# Altium PCB CU.PcbDoc
Units mil, origin at the board's own origin, x right, y up, seen from the top; angles counter-clockwise.
Board outline 3149.61 x 2263.78 mil, 2 copper layers (Top Layer, Bottom Layer); 49 components, 65 nets, 216 pads, 24 vias.
Unrouted connection lines stored in the file: 3.
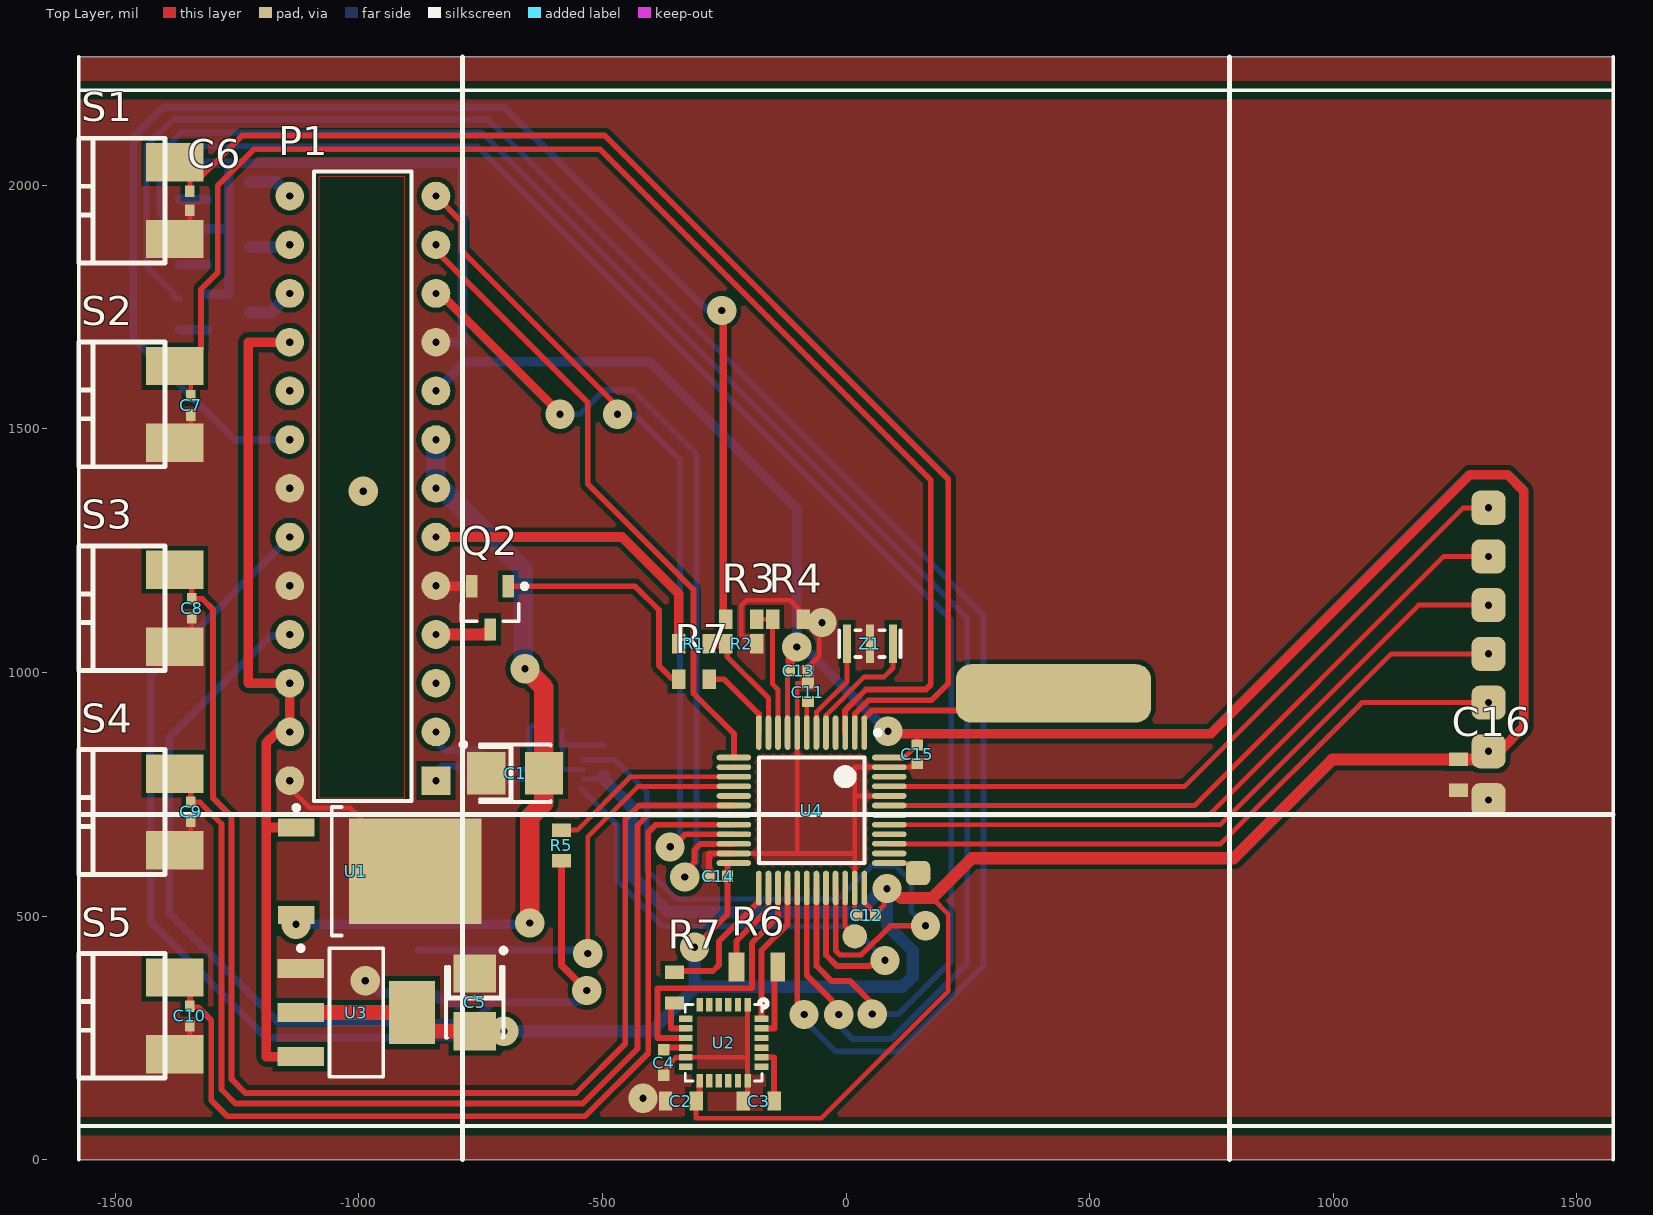
[diagram p0: Top Layer view]
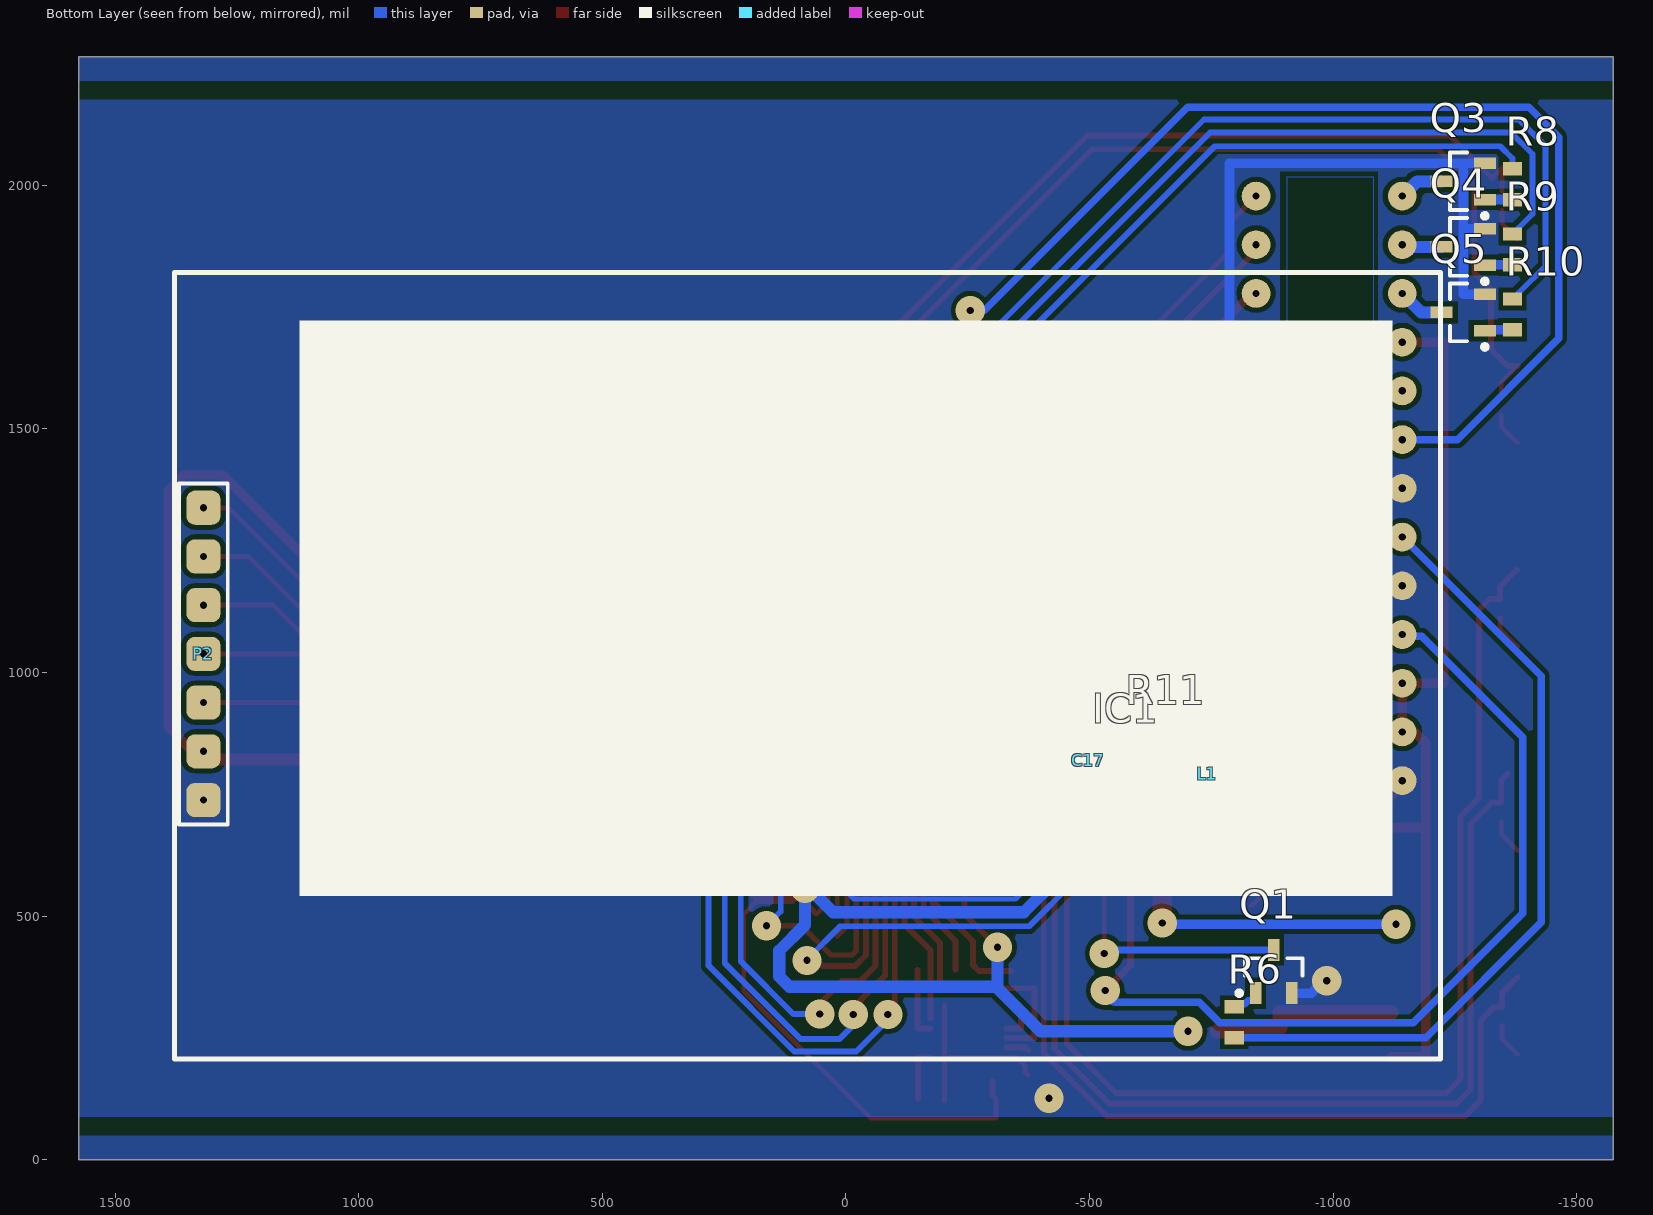
[diagram p1: Bottom Layer view, seen from below]

## Layer stack, top to bottom
Top Solder: solder mask 0.4, Solder Resist, Dk 3.5
Top Layer: signal copper 1.4
Dielectric 1: dielectric 12.6, FR-4, Dk 4.8
Bottom Layer: signal copper 1.4
Bottom Solder: solder mask 0.4, Solder Resist, Dk 3.5

## Board outline
-1574.8,0 -1574.8,2263.78 1574.8,2263.78 1574.8,0

## Design rules (kind name [scope] priority, off if disabled: settings)
Clearance [All] p1: gap=5 ignorepadtopadclearanceinfootprint=FALSE except(0: Arc-Hole Track-Hole SMDPad-Hole THPad-Hole Via-Hole Fill-Hole Poly-Hole Region-Hole Text-Hole; 10: Arc-Poly Track-Poly SMDPad-Poly THPad-Poly Via-Poly Fill-Poly Poly-Poly)
ComponentClearance [All] p1 off: gap=10 collisioncheckmode=3 verticalgap=10 showdistances=FALSE
Height [All] p1 off: minheight=0 maxheight=1000 prefheight=500
MinimumSolderMaskSliver [All] p1 off: minsoldermaskwidth=10
PolygonConnect [All] p1: connectstyle=Direct reliefconductorwidth=10 reliefentries=4 polygonreliefangle="90 Angle" airgapwidth=10
RoutingVias [All] p1: holewidth=28 width=60 viastyle="Through Hole" minholewidth=1 minwidth=1 maxholewidth=280 maxwidth=500
SilkToSilkClearance [All] p1 off: silktosilkclearance=10
SilkToSolderMaskClearance [IsPad] p1 off: minsilkscreentomaskgap=10 clearancetoexposedcopper=TRUE
SolderMaskExpansion [All] p1: expansion=4
Width [All] p1: maxlimit=200 minlimit=8 preferedwidth=10
25 further rules are at their usual default settings.

## Components (designator, comment, footprint, x,y, rotation, side; value= is the part's Value field where it differs from the comment)
C1 "Cap" RR_B -679,793 r0 top value=100nF
C2 "Cap402" 0603x -339,120.32 r0 top value=100nF
C3 "Cap603" 0603x -179,120.32 r0 top value=2.2nF
C4 "Cap402" 0402x#1 -374,199.32 r270 top value=100nF
C5 "Cap" RR_B -762,323 r270 top value=100nF
C6 "Cap" 0402 -1346.81,1968 r270 top value=100nF
C7 "Cap" 0402 -1344.91,1548 r270 top value=100nF
C8 "Cap" 0402 -1343,1132 r270 top value=100nF
C9 "Cap" 0402 -1344.91,714 r270 top value=100nF
C10 "Cap" 0402 -1346.81,295 r270 top value=100nF
C11 "Cap" 0402x#2 -78,959.32 r270 top value=100nF
C12 "Cap" 0402x#2 42,501.32 r0 top value=100nF
C13 "Cap" 0402x#2 -97,1003.32 r180 top value=100nF
C14 "Cap" 0402x#2 -262,582 r0 top value=100nF
C15 "Cap" 0402x#2 146,832.32 r90 top value=100nF
C16 "Cap" 0603x 1257,790 r90 top value=100nF
C17 "Cap" 0603x -497,819.76 r270 bottom value=100nF
IC1 "TCAN332GDCNT" RR_DFN8_3X3 -598.24,790.23 r180 bottom
L1 "CMC 100MA 2LN 90 OHM SMD" Choke_smd -741.87,792.39 r0 bottom
P1 "Header 13X2A" HDR2X13_WIDE -941.73,777.95 r90 top locked
P2 "Header 7" OLED_DISPLAY_2.42 0,1131.89 r180 bottom locked
Q1 "IRLML2502" SOT-23_N -878,386 r90 bottom
Q2 "IRLML2502" SOT-23_N -730.6,1132.71 r270 top
Q3 "IRLML2502" SOT-23_N -1267,2008 r0 bottom
Q4 "IRLML2502" SOT-23_N -1267,1873.5 r0 bottom
Q5 "IRLML2502" SOT-23_N -1267,1739 r0 bottom
R1 "Res1" 0603x -312,1059 r0 top value=1K
R2 "Res1" 0603x -215,1059 r0 top value=1K
R3 "Res1" 0603x -215,1109.32 r0 top value=1K
R4 "Res1" 0603x -119,1109.32 r0 top value=1K
R5 "Res1" 0603x -584,645 r90 top value=1K
R6 "Res1" 0805x -183,395.32 r180 top value=1K
R6 "" 0603x -797,282 r270 bottom value=100
R7 "Res1" 0603x -352,353 r270 top value=1K
R7 "" 0603x -312,986 r0 top value=100
R8 "" 0603x -1368,2002 r90 bottom value=100
R9 "" 0603x -1368,1868.5 r90 bottom value=100
R10 "" 0603x -1368,1735 r90 bottom value=100
R11 "Res1" 0603x -613.92,880.97 r0 bottom value=1K
S1 "SW-PB" BTN_WATEPROOF_RIGHT -1397.64,1968.5 r0 top
S2 "SW-PB" BTN_WATEPROOF_RIGHT -1397.64,1550.2 r0 top
S3 "SW-PB" BTN_WATEPROOF_RIGHT -1397.64,1131.89 r0 top
S4 "SW-PB" BTN_WATEPROOF_RIGHT -1397.64,713.58 r0 top
S5 "SW-PB" BTN_WATEPROOF_RIGHT -1397.64,295.28 r0 top
U1 "LM78M05CDT/NOPB" TD03B_N -957,592 r0 top
U2 "MPU-6000" IMU-3000 -251.17,239.87 r270 top
U3 "LM1117IMP-5.0/NOPB" MP04A_N -1005,302 r0 top
U4 "STM32F303C8T6" LQFP48_N -70.61,717.09 r270 top
Z1 "AWSCR-8.00CV-T" CRYSTAL_3.2X1.3 49.21,1059 r180 top value="CER RES 8.0000MHZ 22PF SMD"

## Footprints (in the part's own frame and the unit in brackets; to place one, negate y for a bottom-side part, rotate by r counter-clockwise, add the part's x,y. Pads: shape width x height; smd on the part's side, far side on the other; paste and mask are expansions set on the pad)
0402 [mm] "Chip Capacitor, Body 1.0x0.5mm, IPC High Density"
  rect 0.6x0.5 smd: 1(-0.5,0) 2(0.5,0)
  body extent -0.55,-0.3 0.55,0.3, height 1.3
0402x#1 [mm] "Chip Capacitor, Body 1.0x0.5mm, IPC Medium Density"
  rect 0.6x0.6 smd: 1(-0.66,0) 2(0.66,0)
  body extent -0.5,-0.25 0.5,0.25, height 0.6
0402x#2 [mm] "Chip Capacitor, Body 1.0x0.5mm, IPC Medium Density"
  rect 0.57x0.6 smd: 1(-0.48,0) 2(0.48,0)
  body extent -0.5,-0.25 0.5,0.25, height 0.6
0603x [mm] "Chip Resistor; Body 1.6 x 0.8 mm (LxW typ)"
  rect 0.7x1 smd: 1(-0.8,0) 2(0.8,0)
0805x [mil] "Chip Resistor; Body 2 x 1.3 mm (LxW typ)"
  rect 33x59.06 smd: 1(42,0)
  rect 30x59.06 smd: 2(-43,0)
BTN_WATEPROOF_RIGHT [mm]
  rect 3x2 smd: 1(0.5,-2) 2(0.5,2)
  silkscreen extent -4.5,-3.25 0,3.25
Choke_smd [mm] "Smd choke"
  rect 0.7x0.45 smd: 1(-0.9,0.4) 2(-0.9,-0.4) 3(0.9,-0.4) 4(0.9,0.4)
  silkscreen extent -1,-0.63 1,0.63
CRYSTAL_3.2X1.3 [mm]
  rect 0.4x2 smd: 1(1.2,0) 2(0,0) 3(-1.2,0)
  silkscreen extent -1.6,-0.7 1.6,0.7, body extent -1.6,-0.7 1.6,0.7, height 0.9
HDR2X13_WIDE [mm] "Connector; Header; 13x2 Position"
  rect 1.5x1.5 hole 0.381: 1(0,-2.54)
  round 1.5 hole 0.381: 2(2.54,-2.54) 3(5.08,-2.54) 4(7.62,-2.54) 5(10.16,-2.54) 6(12.7,-2.54) 7(15.24,-2.54) 8(17.78,-2.54) 9(20.32,-2.54) 10(22.86,-2.54) 11(25.4,-2.54) 12(27.94,-2.54) 13(30.48,-2.54) 14(0,5.08) 15(2.54,5.08) 16(5.08,5.08) 17(7.62,5.08) 18(10.16,5.08) 19(12.7,5.08) 20(15.24,5.08) 21(17.78,5.08) 22(20.32,5.08) 23(22.86,5.08) 24(25.4,5.08) 25(27.94,5.08) 26(30.48,5.08)
  silkscreen extent -1.06,-1.27 31.75,3.81
IMU-3000 [mm]
  rect 0.711x0.337 smd paste-0.03 mask+0.04: 1(-1.975,1.25) 2(-1.975,0.75) 3(-1.975,0.25) 4(-1.975,-0.25) 5(-1.975,-0.75) 6(-1.975,-1.25) 13(1.975,-1.25) 14(1.975,-0.75) 15(1.975,-0.25) 16(1.975,0.25) 17(1.975,0.75) 18(1.975,1.25)
  rect 0.337x0.711 smd paste-0.03 mask+0.04: 7(-1.25,-1.975) 8(-0.75,-1.975) 9(-0.25,-1.975) 10(0.25,-1.975) 11(0.75,-1.975) 12(1.25,-1.975) 19(1.25,1.975) 20(0.75,1.975) 21(0.25,1.975) 22(-0.25,1.975) 23(-0.75,1.975) 24(-1.25,1.975)
  silkscreen extent -2.25,-2 2,2.27, body extent -2,-2 2,2, height 0.95
LQFP48_N [mm] "Thin QFP, 48-Leads, Body 7x7mm, Pitch 0.5mm, IPC Medium Density"
  oval 1.8x0.3 smd: 1(-4.05,2.75) 2(-4.05,2.25) 3(-4.05,1.75) 4(-4.05,1.25) 5(-4.05,0.75) 6(-4.05,0.25) 7(-4.05,-0.25) 8(-4.05,-0.75) 9(-4.05,-1.25) 10(-4.05,-1.75) 11(-4.05,-2.25) 12(-4.05,-2.75) 25(4.05,-2.75) 26(4.05,-2.25) 27(4.05,-1.75) 28(4.05,-1.25) 29(4.05,-0.75) 30(4.05,-0.25) 31(4.05,0.25) 32(4.05,0.75) 33(4.05,1.25) 34(4.05,1.75) 35(4.05,2.25) 36(4.05,2.75)
  oval 0.3x1.8 smd: 13(-2.75,-4.05) 14(-2.25,-4.05) 15(-1.75,-4.05) 16(-1.25,-4.05) 17(-0.75,-4.05) 18(-0.25,-4.05) 19(0.25,-4.05) 20(0.75,-4.05) 21(1.25,-4.05) 22(1.75,-4.05) 23(2.25,-4.05) 24(2.75,-4.05) 37(2.75,4.05) 38(2.25,4.05) 39(1.75,4.05) 40(1.25,4.05) 41(0.75,4.05) 42(0.25,4.05) 43(-0.25,4.05) 44(-0.75,4.05) 45(-1.25,4.05) 46(-1.75,4.05) 47(-2.25,4.05) 48(-2.75,4.05)
  silkscreen extent -4.17,-2.75 2.75,3.58, body extent -3.5,-3.5 3.5,3.5, height 1.6
MP04A_N [mm] "SOT223, 4-Leads, Body 6.5x3.5mm, Pitch 2.3mm, Lead Span 7mm, IPC Medium Density"
  rect 2.4x1 smd: 1(-2.9,2.3) 2(-2.9,0) 3(-2.9,-2.3)
  rect 2.4x3.3 smd: 4(2.9,0)
  silkscreen extent -3.02,-3.35 1.4,3.47, body extent -1.85,-3.35 1.85,3.35, height 1.8
OLED_DISPLAY_2.42 [mil] "Connector; Header; 7 Position"
  rrect50% 70x70 hole 15: 1(-1318.9,-393.7) 2(-1318.9,-293.7) 3(-1318.9,-193.7) 4(-1318.9,-93.7) 5(-1318.9,6.3) 6(-1318.9,106.3) 7(-1318.9,206.3)
  silkscreen extent -1378,-925 1220,689
RR_B [mm] "Capacitor, SM Tantalum; Body 3.5 x 2.8 mm (LxW typ)"
  rect 2x2.2 smd: 1(-1.5,0) 2(1.5,0)
  silkscreen extent -2.82,-1.5 1.85,1.62, body extent -1.5,-1.5 1.5,1.5, height 2.1
RR_DFN8_3X3 [mm] "SON, 8-Leads, Body 3x3mm, Pitch 0.65mm, Microchip Recommended"
  rect 0.65x0.35 smd: 1(-1.4,0.75) 2(-1.4,0.25) 3(-1.4,-0.25) 4(-1.4,-0.75) 5(1.4,-0.75) 6(1.4,-0.25) 7(1.4,0.25) 8(1.4,0.75)
  rect 1.65x2.38 smd: 9(0,0)
  silkscreen extent -2.47,-1.7 1.7,1.82, body extent -1.55,-1.55 1.55,1.55, height 1
SOT-23_N [mm] "SOT23, 3-Leads, Body 2.9x1.3mm, Pitch 0.95mm, Lead Span 2.3mm, IPC Medium Density"
  rect 1.15x0.6 smd: 1(-1.125,0.95) 2(-1.125,-0.95) 3(1.125,0)
  silkscreen extent -1.25,-1.5 0.7,1.93, body extent -0.7,-1.5 0.7,1.5, height 1.11
TD03B_N [mm] "D-PAK, 4-Leads, Body 6.1x6.6mm, Pitch 2.29mm, Lead Span 9.7mm, IPC Medium Density"
  rect 1.9x0.95 smd: 1(-4.35,2.28) 3(-4.35,-2.28)
  rect 6.9x5.5 smd: 4(1.85,0)
  silkscreen extent -4.47,-3.35 -2,3.43, body extent -2.5,-3.35 3.7,3.35, height 2.38

## Part data
C1 C5 C6 C7 C8 C9 C10 C11 C12 C13 C14 C15 C16 C17: "Capacitor", LatestRevisionDate=17-Jul-2002, LatestRevisionNote="Re-released for DXP Platform.", PackageDescription="Radial Cap, Thru-Hole; 2 Leads; 0.3 in Pin Spacing", PackageReference=RAD-0.3, Published=8-Jun-2000, Publisher="Altium Limited"
C2 C4: "Capacitor SMD", Supplier Part Number 1=445-4952-1-ND, ComponentLink2Description=Datasheet, LatestRevisionDate=1-Nov-2010, LatestRevisionNote="Released OpenPilot Lib", PackageReference="0402 (1005 Metric)", Published=1-Nov-2010, Publisher="The OpenPilot Project", Supplier 1=Digi-Key
C3: "Capacitor SMD", Supplier Part Number 1=445-1309-1-ND, LatestRevisionDate=1-Nov-2010, LatestRevisionNote="Released OpenPilot Lib", PackageReference="0603 (1608 Metric)", Published=1-Nov-2010, Publisher="The OpenPilot Project", Supplier 1=Digi-Key
IC1: Package=SOT23-8, Distributor="Texas Instruments", Order Number=TCAN332GDCNT
L1: library part Choke, Package="0805 (2012 Metric), 4 PC Pad", Distributor=Panasonic, Order Number=EXC-34CG900U
P1: "Header, 13-Pin, Dual row", LatestRevisionDate=17-Jul-2002, LatestRevisionNote="Re-released for DXP Platform.", Publisher="Altium Limited"
P2: "Header, 7-Pin", LatestRevisionDate=17-Jul-2002, LatestRevisionNote="Re-released for DXP Platform.", Publisher="Altium Limited"
Q1 Q2 Q3 Q4 Q5: library part IRLML2402, "HEXFET Power MOSFET", ComponentLink1Description="Manufacturer Link", ComponentLink1URL=http://www.irf.com/, ComponentLink2Description=Datasheet, ComponentLink2URL=http://www.irf.com/product-info/datasheets/data/irlml2402.pdf, DatasheetVersion=Aug-1997, LatestRevisionDate=20-Nov-2009, LatestRevisionNote="IPC-7351 Footprint Added.", PackageDescription="3-Pin SOT-23 Package 0.95 mm Pitch, 2.3 mm Lead Span", PackageReference=SOT-23, Published=8-Jun-2000, Publisher="Altium Limited"
R1 R2 R3 R4 R5 R6 R7 R11: "Resistor", LatestRevisionDate=17-Jul-2002, LatestRevisionNote="Re-released for DXP Platform.", PackageDescription="Axial Device, Thru-Hole; 2 Leads; 0.3 in Pin Spacing", PackageReference=AXIAL-0.3, Published=8-Jun-2000, Publisher="Altium Limited"
R6 R7 R8 R9 R10: library part Res1, "Resistor", LatestRevisionDate=17-Jul-2002, LatestRevisionNote="Re-released for DXP Platform.", PackageDescription="Axial Device, Thru-Hole; 2 Leads; 0.3 in Pin Spacing", PackageReference=AXIAL-0.3, Published=8-Jun-2000, Publisher="Altium Limited"
S1 S2 S3 S4 S5: "Switch", LatestRevisionDate=17-Jul-2002, LatestRevisionNote="Re-released for DXP Platform.", PackageDescription="Switch; 2 Leads", PackageReference=SPST-2, Published=24-Mar-1999, Publisher="Altium Limited"
U1: "3-Terminal Positive Voltage Regulators, 3-pin TO-252, Pb-Free", Manufacturer="National Semiconductor", PackageTopMarking=NSUZXYTT*LM78M05*CDT, PowerWise=N, Supplier Part Number 1=LM78M05CDT-ND, Code_JEDEC=TO-252-AA, ComponentLink1Description="LM78M05 Datasheet", ComponentLink1URL=http://www.national.com/ds/LM/LM78M05.pdf, ComponentLink2Description="LM78M05 Web Page", ComponentLink2URL=http://www.national.com/pf/LM/LM78M05.html, ComponentLink3Description="TD03B Package Page", ComponentLink3URL=http://www.national.com/packaging/folders/td03b.html, CompType="LDO IC", DatasheetVersion=Aug-2005, PackageDescription="TO252, Molded, Jedec, 6.8 x 6.10 x 2.30mm Body, 3 Lead, 2.28mm Pitch, Surface Mount", PackageReference=TD03B, PackageVersion="revD, Feb-2009", PartNumber=LM78M05CDT/NOPB, PinCount=3, Published=1-Mar-2010, Publisher="Altium Limited", RoHS=Y, Supplier 1=Digi-Key, Supplier 2=Farnell, Supplier Part Number 2=1469112
U2: library part MPU-3/6000, "Invensense MPU-3/6000,  3-axis Gyros & Accel on 6000", Manufacturer=Invensense, ComponentLink2Description=Datasheet, LatestRevisionDate=1-Nov-2010, LatestRevisionNote="Released OpenPilot Lib", Published=1-Nov-2010, Publisher="The OpenPilot Project", Supplier 1=Invensense, Supplier Part Number 1=MPU-6000
U3: "800mA Low-Dropout Linear Regulator, 4-pin SOT-223, Pb-Free", Manufacturer="National Semiconductor", PackageTopMarking=XYTT*N06B, PowerWise=N, Supplier Part Number 1=LM1117IMP-5.0TR-ND, Code_IPC=SOT223-4, Code_JEDEC=TO-261-AA, ComponentLink1Description="LM1117 Datasheet", ComponentLink1URL=http://www.national.com/ds/LM/LM1117.pdf, ComponentLink2Description="LM1117 Web Page", ComponentLink2URL=http://www.national.com/pf/LM/LM1117.html, ComponentLink3Description="MP04A Package Page", ComponentLink3URL=http://www.national.com/packaging/folders/mp04a.html, CompType="LDO IC", DatasheetVersion=Apr-2006, PackageDescription="Molded SOT-223, 6.50 x 3.56 x 1.6mm Body, 4 Lead, 2.3mm Pitch", PackageReference=MP04A, PackageVersion="revB, Apr-2003", PartNumber=LM1117IMP-5.0/NOPB, PinCount=4, Published=1-Mar-2010, Publisher="Altium Limited", RoHS=Y, Supplier 1=Digi-Key, Supplier 2=Digi-Key, Supplier 3=Digi-Key, Supplier 4=Farnell, Supplier Part Number 2=LM1117IMP-5.0CT-ND, Supplier Part Number 3=LM1117IMP-5.0DKR-ND, Supplier Part Number 4=1469052
U4: library part STM32F103C6T6, "STM32 ARM-based 32-bit MCU with 32 Kbytes Flash, 48-pin LQFP, Industrial Temperature", ComponentLink1Description="Manufacturer Link", ComponentLink1URL=www.st.com/stm32, ComponentLink2Description=Datasheet, ComponentLink2URL=http://www.st.com/stonline/products/literature/ds/13587.pdf, DatasheetVersion="rev6, Mar-2008", PackageDescription="48-Pin Low-Profile Quad Flat Pack, 7 x 7 mm Body, 0.5 mm Pitch (LQFP48)", PackageReference=LQFP48, PackageVersion=Mar-2008, Published=30-May-2008, Publisher="Altium Limited"
Z1: library part Crystal_smd_with_caps, Package="3-SMD, Non-Standard", Distributor="Abracon LLC", Order Number=AWSCR-8.00CV-T

## Free pads (board coordinates)
  rrect50% 50x50 smd: 0(148,588.32)
  round 50 smd: 1(18,458.32)
  rrect50% 400x120 smd: 2(426,957)

## Via types
v1: diameter 60, hole 15, Top Layer to Bottom Layer, 24 vias

## Nets (pads, with @x,y where several pads share a name; then routed paths per layer and width w, separated by ;. In a path a pad name is that pad's centre, name@x,y a point inside that pad or via, vN(x,y) a via of type N, cw(c..) or ccw(c..) an arc to the next point about the centre after c; other vN are vias at no path point)
3.3V: C2.2 C5.2 C12.2 C13.2 C14.2 C15.2 C16.2 C17.2 IC1.3 P1.9 P2.2 U2.13 U3.2 U3.4 U4.9 U4.24 U4.36 U4.48 | length 8781.2
  Top Layer w10: C2.2 -307.5,85 -51,85 210,346 210,504 177,537 ; C2.2@-307.5,125.32 C2.2@-301,131.82 ; U2.13@-301,161.51 U2.13 ; U4.9 -119.83,999.39 C13.2 ; U4.36 38,557.3 38,527.17 60.01,505.16 63.15,505.16 66.12,508.13 66.12,510.43 77.75,522.07 77.75,549.82 v1(84.24,556.32) ; U4.48 89.18,825.71 120.5,825.71 139.19,844.4 139.19,844.99 C15.2@145.41,851.21 ; 139.01,874.32 139.19,874.14 ; C15.2@139.19,857.43 C15.2@145.41,851.21 ; C15.2 C15.2@145.41,851.21 ; C15.2@146.03,857.43 146.03,874.14
  Top Layer w12: v1(-311,436) -243.1,503.9 C14.2 -243.1,608.83 U4.24 ; C2.2@-301,131.82 U2.13@-301,161.51
  Top Layer w20: C13.2 -114.68,1004.54 v1@-114.68,1027.81 ; v1@84.24,874.32 139.01,874.32 749.32,874.32 1281,1406 1358,1406 1391,1373 1391,888 1341.19,838.19 P2.2
  Top Layer w25: 113.03,537 177,537 258.67,618.67 795.67,618.67 998.09,821.09 1301.8,821.09 P2.2
  Top Layer w30: U3.2 U3.4 -890.83,270.83 -883.94,263.94 C5.2
  Bottom Layer w10: IC1.3@-539.12,780.97 C17.2@-497,780.97
  Bottom Layer w20: P1.9 -781.69,1638 -403,1638 -101,1336 v1(-101,1052.32) -90.18,1052.32 -74.87,1037.01 -71.45,1037.01 v1(86.24,879.32)
  Bottom Layer w25: v1(-702,263.68) -399.32,263.68 -308,355 ; C17.2 -497,780.97 -439.42,723.39 -439.42,582.42 -365,508 26.46,508 74.77,556.32 v1(84.24,556.32) 84.24,481.76 137,429 137,376 116,355 -308,355 ; v1(-311,436) -311,358 -308,355
5V: C1.2 P1.7 P1.8 P1.22 U1.3 | length 1594.1
  Top Layer w40: v1(-659,1007.83) -619.94,968.77 C1.2 -619.94,732.06 -649,703 v1(-649,485.66) v1@-649,477.66
  Bottom Layer w20: v1(-1129,483) v1@-644,483
  Bottom Layer w40: P1.8 P1.7 -836.58,1377.95 -827.05,1368.43 -819.65,1368.43 -662,1210.78 v1@-662,1009
12V: P1.3 P1.15 P1.16 P1.23 U1.1 U3.3 | length 1804.4
  Top Layer w20: P1.23 -1227,1677.95 -1227,977.95 P1.16 P1.15 -1167.05,877.95 -1190,855 -1190,681.76 ; U1.1 -1190,681.76 ; U3.3 -1190,211.45 -1190,681.76
_A4: U4.14
_A7: U4.17
_A15: U4.38
_B4: U4.40
_B9: U4.46
_C15: U4.4
A_C\S\: R7.1@-352,384.5 U4.25 | length 250
  Top Layer w12: R7.1@-340,387.31 -273.01,387.31 -261,399.32 -261,448 -180.79,528.21 U4.25@-178.98,528.21 ; U4.25@-178.88,526.12 U4.25@-178.88,528.21
A_MISO: U2.9 U4.27 | length 582.2
  Top Layer w12: U2.9 -387,249.72 -387,352 -193,352 -193,445 -139.51,498.49 U4.27
A_MOSI: U2.24 U4.28 | length 290.8
  Top Layer w12: U2.24 -173.42,429.58 -119.83,483.17 U4.28
A_SCK: R6.1@-225,395.32 U4.26 | length 194.6
  Top Layer w12: R6.1@-225,390.32 -225,395.32 -225,448.94 -159.54,514.4 -159.54,557.3 U4.26
ACCEL: P1.6 R1.1 | length 649.2
  Top Layer w20: P1.6 -459.64,1277.95 -343.5,1161.81 R1.1
B01: C6.1 S1.2 U4.2 | length 2617.5
  Top Layer w10: C6.1 -1346.81,2035.79 S1.2@-1326.01,2014.99
  Top Layer w12: S1.2@-1326.01,2014.99 -1239,2102 -495.13,2102 210,1396.87 210,977.32 175.68,943 46,943 17.97,914.97 U4.2
B02: C7.1 S2.2 U4.3 | length 2932.6
  Top Layer w10: S2.2 -1344.91,1595.89 C7.1
  Top Layer w12: S2.2 -1358.27,1628.94 -1323.9,1663.31 -1323.9,1786.34 -1289.37,1820.87 -1289.37,1999.63 -1215,2074 -505,2074 174,1395 174,975 163.94,964.94 40.94,964.94 -1.72,922.28 U4.3
B03: C8.1 S3.2 U4.18 | length 2664.4
  Top Layer w12: S3.2 -1376.37,1210.63 -1343,1177.26 C8.1 -1342.31,1151 -1321,1151 -1299,1129 -1299,742 -1261,704 -1261,165 -1233,137 -554,137 -453,238 -453,699 -425.06,726.94 U4.18
B04: C9.1 S4.2 U4.19 | length 2268.1
  Top Layer w12: S4.2@-1358.27,792.32 -1344.91,778.96 C9.1 ; C9.1@-1344.91,733 -1326,733 -1282,689 -1282,144 -1253,115 -540.64,115 -428,227.64 -428,686 -406.75,707.25 U4.19
B05: C10.1 S5.2 U4.20 | length 1891.3
  Top Layer w12: S5.2 -1346.81,342.87 C10.1 ; C10.1@-1346.81,312.72 -1329.72,312.72 -1303,286 -1303,122 -1270,89 -535.53,89 -406,218.53 -406,672 -390.43,687.57 U4.20
BRAKE: P1.21 R3.1 | length 2863.6
  Top Layer w15: v1(-255,1743) -252.25,1740.25 -252.25,1115.07 R3.1
  Bottom Layer w15: P1.21 -1254.95,1477.95 -1463,1686 -1463,2099 -1402,2160 -701,2160 -284,1743 v1(-255,1743)
CAN_H: L1.2 P1.1 | length 87.1
  Bottom Layer w15: P1.1 -841.73,795.27 -828.87,808.13 L1.2
CAN_L: L1.1 P1.2 | length 217.5
  Bottom Layer w15: P1.2 -841.73,858.73 -824,841 -754,841 -743,830 -743,776.64 L1.1
CAN_RX: IC1.4 U4.32 | length 1076.7
  Top Layer w12: U4.32 -41.09,420 -18.86,397.77 48.83,397.77 50.87,399.82
  Bottom Layer w12: IC1.4 -469,686.58 -469,572 -376,479 12,479 80,411 v1(80,409)
CAN_TX: IC1.1 U4.33 | length 1370.3
  Top Layer w11: U4.33 -21.4,429.4 -12,420 31,420 91,480 v1(163,480)
  Bottom Layer w11: IC1.1@-539.12,820.34 -474.34,820.34 -409,755 -409,596 -348,535 -16,535 52,603 102,603 134,571 134,509 v1(163,480)
CLK: P2.3 U4.39 | length 1350.2
  Top Layer w10: U4.39 769.2,648.2 1059.19,938.19 P2.3
CS: P2.7 U4.45 | length 1466.9
  Top Layer w10: U4.45 695.31,766.31 1266.76,1337.76 1318.46,1337.76 P2.7
D/C: P2.6 U4.43 | length 1441.8
  Top Layer w10: U4.43 715.94,726.94 1227.19,1238.19 P2.6
GND: C1.1 C2.1 C3.1 C4.2 C5.1 C6.2 C7.2 C8.2 C9.2 C10.2 C11.1 C12.1 C13.1 C14.1 C15.1 C16.1 C17.1 IC1.2 IC1.9 P1.5 P1.10 P1.14 P1.18 P1.20 P2.1 Q1.2 Q2.2 Q3.2 Q4.2 Q5.2 R2.2 R4.2 R11.2 S1.1 S2.1 S3.1 S4.1 S5.1 U1.4 U2.1 U2.11 U2.18 U3.1 U4.8 U4.23 U4.35 U4.44 U4.47 Z1.2 | length 4627.1
  Top Layer w10: S5.1 -1346.81,247.68 C10.2 ; S4.1 -1344.91,667.89 C9.2 ; S3.1 -1377.37,1053.15 -1343,1087.52 C8.2 ; S2.1 -1344.91,1504.5 C7.2 ; S1.1 -1346.81,1920.91 C6.2 ; P1.14 -1141.73,762.73 -1101,722 -1017.28,722 -934.34,639.06 -934.34,623.32 U1.4@-832.68,521.65 ; U1.4@-884.17,606.06 U1.4 U1.4@-762,592 ; C4.2 -367.58,179.73 -367.58,191.73 -349.87,209.45 -329.83,209.45 U2.11 -201.99,210.35 ; U4.23 -100.14,628.51 ; -206.21,1069.21 -215,1078 -215,1137.32 -204,1148.32 -115,1148.32 -55,1088.32 -55,1033.32 -78,1010.32 C11.1 -78.59,978.21 -79.49,977.32 -100.14,977.32 U4.8 -100.14,628.51 ; C3.1@-201.96,120.32 U2.18 -201.96,210.32 U2.1 ; C12.1@22.1,501.32 17.97,505.45 U4.35 17.97,628.51 ; U4.44 17.97,746.62 ; C15.1 145.41,813.42 137.67,805.68 U4.47 17.97,805.68 17.97,746.62 ; -100.14,628.51 17.97,628.51 ; 17.97,628.51 17.97,746.62
  Top Layer w12: C14.1 -280.9,628.51 U4.23
  Top Layer w15: -206.21,1069.21 -189.78,1069.21 -183.5,1062.93 R2.2@-183.5,1058.32
  Top Layer w20: P1.5 -840.78,1177 Q2.2
  Bottom Layer w10: R11.2 -582.43,851.25 ; IC1.2@-539.12,800.65 -582.43,800.65 -582.43,851.25 ; C17.1 -582.43,851.25
  Bottom Layer w20: Q5.2 -1267,1776.4 -1267,1911 ; Q4.2 -1311.29,1911 -1267,1911 ; Q3.2 -1267,2045.4 ; v1(-987,367) -980.58,367 -955.28,341.71 Q1.2 ; P1.10 -787,1677.95 -787,2045.4 -1267,2045.4 ; -1267,1911 -1267,2045.4
  other v1: -416.57,125.88 -49.21,1102.36 -990.65,1372.04
L_B: P1.24 Q5.3 | length 97.1
  Bottom Layer w25: Q5.3 -1180.69,1739 P1.24
L_B_: R10.2 U4.29 | length 3939.3
  Top Layer w12: v1@-100.14,324.32 U4.29
  Bottom Layer w12: R10.2 -1373.91,1766.5 -1380.19,1772.78 -1380.19,1778.68 -1436,1834.5 -1436,2080 -1381,2135 -735,2135 282,1118 282,398 106,222 -21,222 -76.82,277.82 -76.82,288.82 v1(-86,298)
L_FR: P1.4 Q2.3 | length 121
  Top Layer w25: P1.4 -744.55,1077.95 -744.23,1078.28 -731.29,1078.28 -731.29,1087.73 Q2.3
L_FR_: R7.2@-280.5,986 U4.12 | length 169.3
  Top Layer w12: R7.2@-280.5,986 -250.22,986 -178.88,914.66 U4.12
L_G: P1.25 Q4.3 | length 82.8
  Bottom Layer w25: Q4.3 -1146.19,1873.5 P1.25
L_G_: R9.2 U4.30 | length 3630.8
  Top Layer w12: U4.30 -80.46,378.46 -29.44,327.44 -29.44,325.43 -15,310.99 v1(-15,298)
  Bottom Layer w12: R9.2 -1373.91,1900 -1380.19,1906.28 -1380.19,1912.18 -1409,1941 -1409,2064 -1365,2108 -747,2108 249,1112 249,403 94,248 13,248 -10.88,271.88 -10.88,293.88 v1(-15,298)
L_PWM: P1.17 R5.1 | length 1964.9
  Top Layer w15: R5.1 -584,399.2 v1(-532,347.2)
  Bottom Layer w15: P1.17 -1145.36,1074.32 -1181.68,1074.32 -1389,867 -1389,506 -1164,281 -767,281 -725,323 -556.2,323 ccw(c-556.2,347.2) v1(-532,347.2)
L_R: P1.26 Q3.3 | length 93.4
  Bottom Layer w25: Q3.3 -1171.78,2008 P1.26
L_R_: R8.2 U4.31 | length 3253.9
  Top Layer w12: U4.31 -60.77,397.77 -30,367 7.65,367 54,320.65 v1(54,299)
  Bottom Layer w12: R8.2 -1368,2055 -1343,2080 -757,2080 216,1107 216,407 108,299 v1(54,299)
MOSI: P2.4 U4.41 | length 1375.3
  Top Layer w10: U4.41 768.57,687.57 1119.19,1038.19 P2.4
NetC3_2: C3.2 U2.20 | length 110.8
  Top Layer w12: U2.20@-172.79,209.72 U2.20 -148,210.35 C3.2@-148,125.81
NetC4_1: C4.1 U2.10 | length 47
  Top Layer w12: C4.1 -369.28,230.03 U2.10
NetC11_2: C11.2 U4.7 | length 64.9
  Top Layer w10: U4.7 -80.46,937.96 C11.2
NetIC1_6: IC1.6 L1.4 | length 58.9
  Bottom Layer w12: L1.4 -706.21,776.87 -682.58,776.87 -678.49,780.97 IC1.6@-649.35,780.97
NetIC1_7: IC1.7 L1.3 | length 60.2
  Bottom Layer w12: L1.3 -682.58,808.13 -675.1,800.65 IC1.7@-649.35,800.65
NetIC1_8: IC1.8 R11.1 | length 71.9
  Bottom Layer w12: IC1.8@-649.35,820.34 -649.35,884.75 R11.1@-644.08,890.02
NetQ1_1: Q1.1 R6.1@-797,313.5 | length 61.6
  Bottom Layer w15: Q1.1 -840.6,330.88 -836.29,326.57 -825.46,326.57 -818.67,319.78 -803.28,319.78 R6.1@-797,313.5
NetQ2_1: Q2.1 R7.1@-343.5,986 | length 495.6
  Top Layer w12: Q2.1 -433,1177 -384,1128 -384,1014 -358,988 -345.5,988 R7.1@-343.5,986
NetQ3_1: Q3.1 R8.1 | length 56.8
  Bottom Layer w20: R8.1 -1368,1970.6 Q3.1
NetQ4_1: Q4.1 R9.1 | length 57.6
  Bottom Layer w20: R9.1 -1311.29,1837 Q4.1
NetQ5_1: Q5.1 R10.1 | length 58.6
  Bottom Layer w20: R10.1 -1311.29,1703.5 Q5.1
NetR1_2: R1.2 R2.1 U4.11 | length 254.1
  Top Layer w11: R2.1@-248,1051.82 -244,1055.82 -244,1032.32 -159.2,947.51 U4.11
  Top Layer w20: R1.2 R2.1
NetR3_2: R3.2 R4.1 U4.10 | length 271.7
  Top Layer w10: R3.2 -151.5,1109.32 -150.5,1110.32 R4.1 -150.5,975.92 -139.51,964.94 U4.10
NetR5_2: R5.2 U4.15 | length 399.3
  Top Layer w10: R5.2 -551.9,676.5 -442.4,785.99 U4.15
NetR6_2: R6.2@-140,395.32 U2.23 | length 146
  Top Layer w12: U2.23 -147,269.4 R6.2@-147,389
NetR7_2: R7.2@-352,321.5 U2.8 | length 94
  Top Layer w12: R7.2@-342,326.32 -359,309.32 -359,269.4 U2.8
RES: P2.5 U4.42 | length 1408.6
  Top Layer w10: U4.42 744.25,707.25 1175.19,1138.19 P2.5
RX1: P1.12 U4.13 | length 1306
  Top Layer w12: P1.12 -833.74,1869.96 -833.74,1857.74 -530,1554 -530,1387 -313,1170 -313,957.02 -230.06,874.09 U4.13
RX2: P1.11 U4.22 | length 1733.5
  Top Layer w12: v1(-331,580) -331,591.03 -311,611.03 -311,636 -298.8,648.2 U4.22
  Top Layer w18: P1.11@-833,1777.95 -587,1531.95 v1(-587,1530)
  Bottom Layer w12: v1(-587,1530) -546,1530 -496,1580 -439,1580 -307,1448 -307,611.03 -331,587.03 v1(-331,580)
SWCLK: pad.0 U4.37 | length 67.7
  Top Layer w10: U4.37 89.18,608.48 127.83,608.48 pad.0
SWDIO: pad.1 U4.34 | length 107.5
  Top Layer w10: U4.34 -1.72,478.03 pad.1
TACHO: Q1.3 U4.16 | length 934.3
  Top Layer w10: v1(-530,423.2) -530,662.54 -426.23,766.31 U4.16
  Bottom Layer w15: Q1.3 -537.09,430.29 cw(c-537.09,423.2) v1(-530,423.2)
TACHO_I: P1.19 R6.2@-797,250.5 | length 1637.1
  Bottom Layer w15: P1.19 -1427,992.68 -1427,487 -1190.5,250.5 R6.2@-797,250.5
TX: P1.13 U4.21 | length 1714.9
  Top Layer w12: P1.13 -789,1925.22 -789,1866 -467,1544 -467,1532 v1(-469,1530) ; v1(-361,642) -355.85,642 -329.97,667.88 U4.21
  Bottom Layer w12: v1(-469,1530) -435,1530 -341,1436 -341,662 v1(-361,642)
Vbat: pad.2 U4.1 | length 419.8
  Top Layer w12: U4.1@37.75,905.98 54.05,922.28 359.38,922.28 pad.2@424,986.91
XT1: U4.6 Z1.1 | length 208.4
  Top Layer w10: U4.6 -60.77,918.54 1.97,981.28 Z1.1
XT2: U4.5 Z1.3 | length 263.2
  Top Layer w10: U4.5 -40.74,876.89 -40.74,912.57 37.68,991 78.24,991 96.46,1009.21 Z1.3
pads on no net: IC1.5 U2.2 U2.3 U2.4 U2.5 U2.6 U2.7 U2.12 U2.14 U2.15 U2.16 U2.17 U2.19 U2.21 U2.22

## Polygon pours and split planes (outlines as drawn)
GND on Top Layer "Top Layer-No Net" (solid, pour order 6): -1082.68,742.95 -905.51,742.95 -905.51,2017.82 -1082.68,2017.82
no net on Top Layer "Top Layer-No Net 1" (solid, pour order 12): -1574.8,49.21 1574.8,49.21 1574.8,0 -1574.8,0
no net on Top Layer "Top Layer-No Net 2" (solid, pour order 10): -1574.8,2263.78 1574.8,2263.78 1574.8,2214.57 -1574.8,2214.57
GND on Top Layer "Top Layer-GND" (solid, remove dead copper, pour order 7): -1574.8,2175.2 -1574.8,88.58 1574.8,88.58 1574.8,2175.2
GND on Bottom Layer "Bottom Layer-No Net" (solid, pour order 5): -1082.68,742.95 -905.51,742.95 -905.51,2017.82 -1082.68,2017.82
no net on Bottom Layer "Bottom Layer-No Net 1" (solid, pour order 11): -1574.8,2263.78 1574.8,2263.78 1574.8,2214.57 -1574.8,2214.57
no net on Bottom Layer "Bottom Layer-No Net 2" (solid, pour order 9): -1574.8,49.21 1574.8,49.21 1574.8,0 -1574.8,0
GND on Bottom Layer "Bottom Layer-GND" (solid, remove dead copper, pour order 8): -1574.8,2175.2 -1574.8,88.58 1574.8,88.58 1574.8,2175.2

## Other copper
Multi-Layer:
  pour cut-out: -1091.73,2027.95 -1091.73,736.29 -891.73,736.29 -891.73,2027.95

## Silkscreen, mask and mechanical layers (free items; w line width, h text height)
Top Overlay:
  lines w7.87: -1574.8,0 -1574.8,2263.78 ; -1574.8,68.9 1574.8,68.9 ; -1574.8,2194.88 1574.8,2194.88 ; 1574.8,0 1574.8,2263.78
  lines w10: -1574.8,708.66 1574.8,708.66 ; -787.4,0 -787.4,2263.78 ; 787.4,0 787.4,2263.78